# Altium PCB PMP9517.PcbDoc
Units mm, origin at the board's own origin, x right, y up, seen from the top; angles counter-clockwise.
Board outline 53.5 x 31 mm, 2 copper layers (Top Layer, Bottom Layer), stack 1.575 mm thick; 55 components, 23 nets, 103 pads, 12 vias.
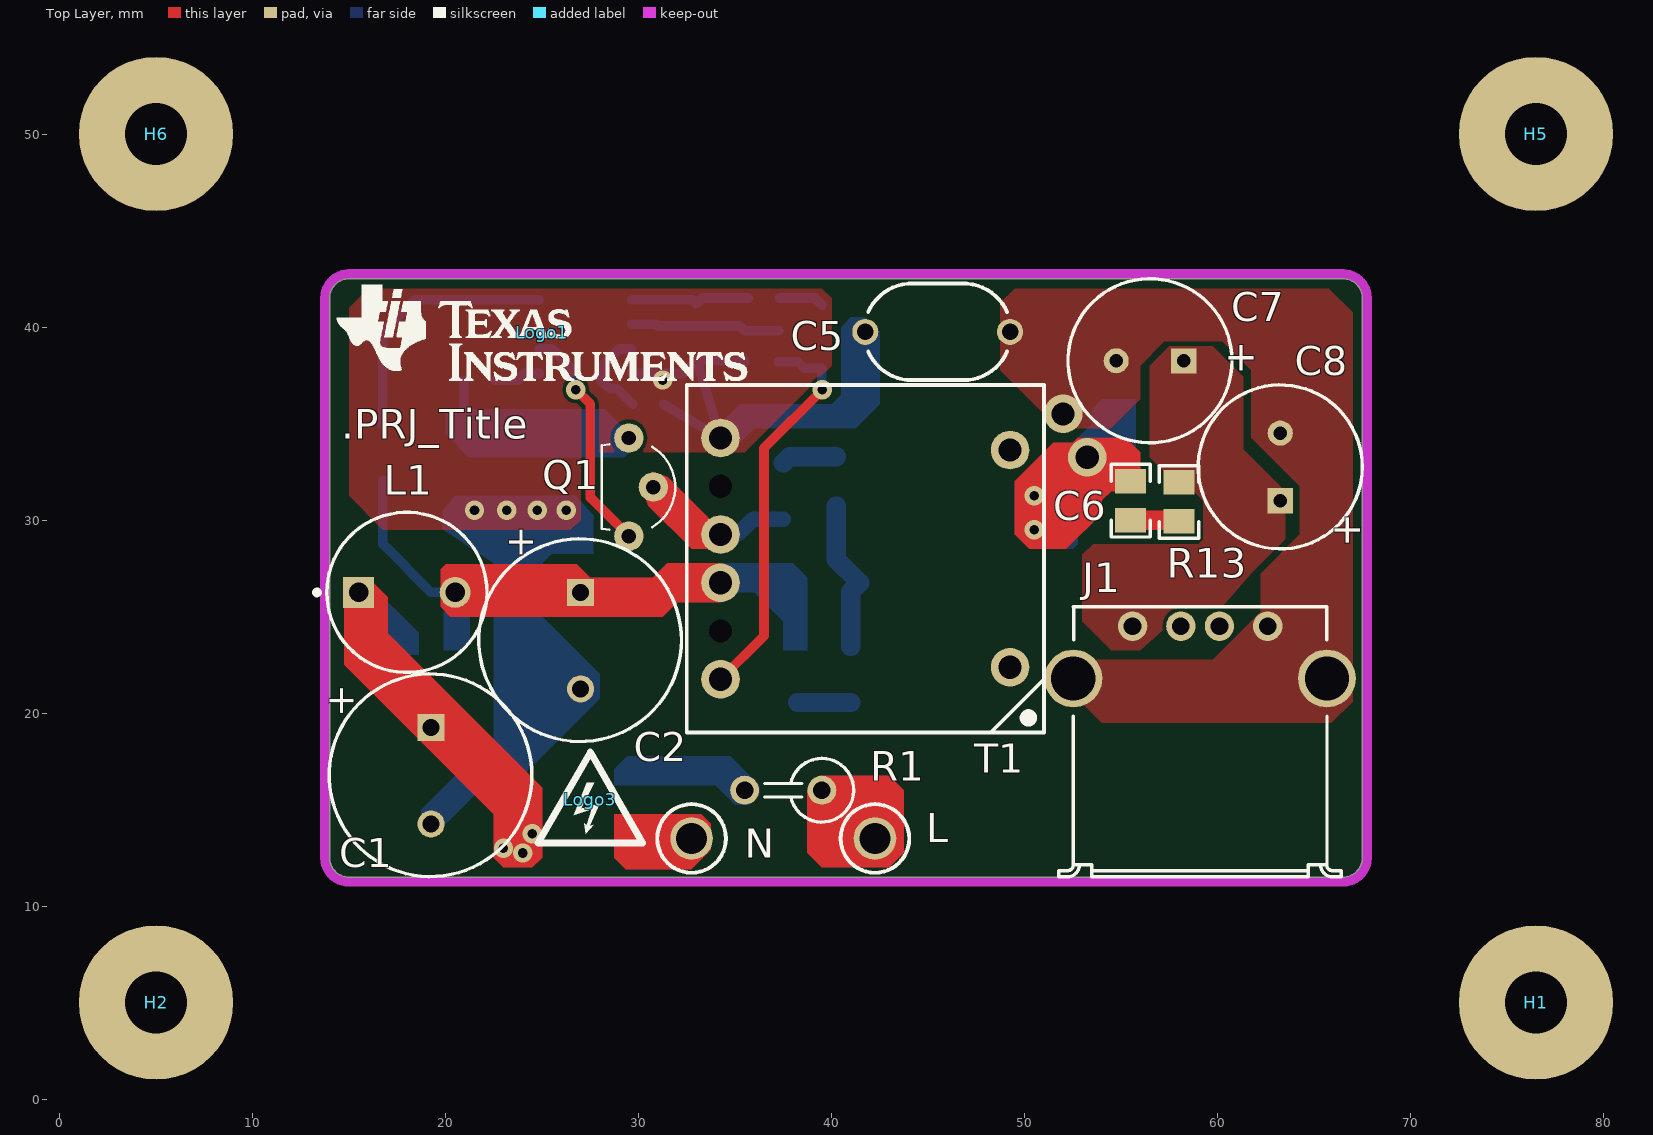
[diagram p0: Top Layer view]
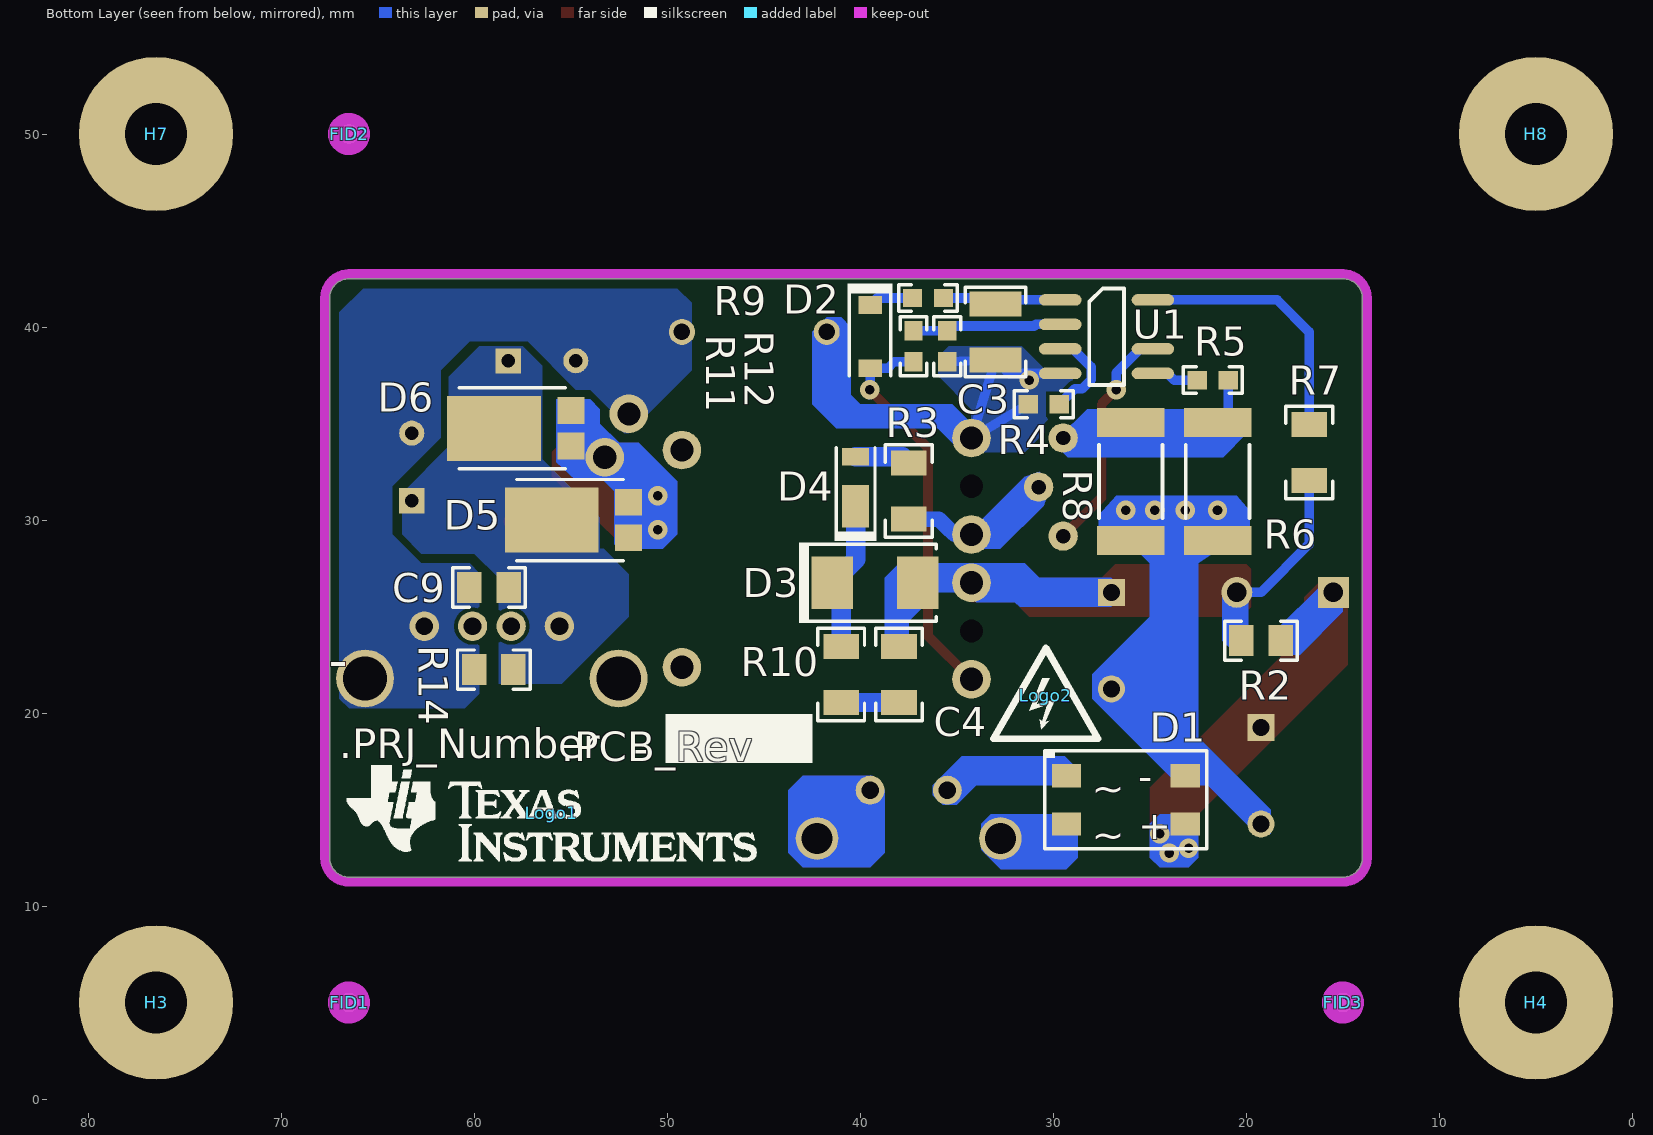
[diagram p1: Bottom Layer view, seen from below]

## Layer stack, top to bottom
Top Layer: signal copper 0.0356
Dielectric: core 1.5037, FR-4, Dk 4.8
Bottom Layer: signal copper 0.0356

## Board outline
15,11.5 cw(c15,12.5) 14,12.5 14,41.5 cw(c15,41.5) 15,42.5 66.5,42.5 cw(c66.5,41.5) 67.5,41.5 67.5,12.5 cw(c66.5,12.5) 66.5,11.5

## Design rules (kind name [scope] priority, off if disabled: settings)
AcuteAngle [All] p1: minimum=4.50000000000000E+0001 checktracksonly=FALSE
AssemblyTestPointUsage [All] p1: valid=2
Clearance "Schematic Clearance Constraint_1" [InNet('NetQ1_2')] p1: gap=1
Clearance "Schematic Clearance Constraint" [InNet('NetC2_1')] p2: gap=1
Clearance Clearance_BoardEdge_MountingHoles [OnCopper and InComponentClass('Mounting Holes') vs IsKeepOut] p3: gap=0.25
Clearance Clearance_BoardEdge_Poly [OnCopper and InPoly vs OnLayer('Keep-Out Layer')] p4: gap=0.5
Clearance Clearance_BoardEdge [OnCopper and Not InComponentClass('Logo') and not InComponentClass('FiducialMark') and not InRegion(1000,500,4000,800) and Not IsKeepout vs IsKeepOut] p5: gap=0
Clearance Clearance_Poly [InPolygon] p6: gap=0.2
Clearance [All] p7: gap=0.25
ComponentClearance ComponentClearance_Logo [InComponentClass(Logo)] p1: gap=0.2 collisioncheckmode=3 verticalgap=0.254 showdistances=FALSE
ComponentClearance ComponentClearance_ScrewToNut [(HasFootprint('NY PMS 440 0025 PH')) vs (HasFootprint('Keystone_1902C'))] p2: gap=0.127 collisioncheckmode=3 verticalgap=0.254 showdistances=FALSE
ComponentClearance ComponentClearance_MountingHoles [InComponentClass('Mounting Holes')] p3: gap=0.2 collisioncheckmode=3 verticalgap=0 showdistances=FALSE
ComponentClearance ComponentClearance_SmallPassives [HasFootprint('0201*') or HasFootprint('0402*') or HasFootprint('0508') or HasFootprint('0603*') or HasFootprint('0612') or HasFootprint('0805*') or HasFootprint('0815*') or HasFootprint('0830*') or HasFootprint('1206*') or HasFootprint('1210*') or HasFootprint('1808*') or HasFootprint('1812*') or HasFootprint('1825*') or HasFootprint('2010*') or HasFootprint('2220*') or HasFootprint('2225*') or HasFootprint('2512*') or HasFootprint('2728*') or HasFootprint('3518*') vs HasFootprint('0201*') or HasFootprint('0402*') or HasFootprint('0508') or HasFootprint('0603*') or HasFootprint('0612') or HasFootprint('0805*') or HasFootprint('0815*') or HasFootprint('0830*') or HasFootprint('1206*') or HasFootprint('1210*') or HasFootprint('1808*') or HasFootprint('1812*') or HasFootprint('1825*') or HasFootprint('2010*') or HasFootprint('2220*') or HasFootprint('2225*') or HasFootprint('2512*') or HasFootprint('2728*') or HasFootprint('3518*')] p4: gap=0.508 collisioncheckmode=3 verticalgap=0.254 showdistances=FALSE
ComponentClearance ComponentClearance_THtoSMT [IsThruComponent vs IsSMTComponent] p5: gap=0.2 collisioncheckmode=3 verticalgap=0 showdistances=FALSE
ComponentClearance ComponentClearance_THtoTH [IsThruComponent vs IsThruComponent] p6: gap=0 collisioncheckmode=3 verticalgap=0 showdistances=FALSE
ComponentClearance [All] p7: gap=0.2 collisioncheckmode=3 verticalgap=0.254 showdistances=FALSE
DiffPairsRouting [All] p1: maxlimit=2.54 minlimit=0.254 mostfreqgap=0.254 maxuncoupledlength=25.4
FabricationTestPointUsage TestPointUsage [All] p1: valid=2 allowmultiple=FALSE
FabricationTestpoint Testpoint [All] p1: side=3 testpointundercomponent=TRUE minsize=1.016 maxsize=2.54 preferedsize=1.524 minholesize=0 maxholesize=1.016 preferedholesize=0.813 testpointgrid=0.025 allowsidetop=TRUE allowsidebottom=TRUE usegrid=TRUE gridtolerance=0
FanoutControl Fanout_LCC [IsLCC] p1: bgadir=Out bgaviamode=Centered fanoutstyle=Auto fanoutdirection=Alternating viagrid=0.025 // Fanout_LCC (Default Rule)
FanoutControl Fanout_BGA [IsBGA] p2: bgadir=Out bgaviamode=Centered fanoutstyle=Auto fanoutdirection=Alternating viagrid=0.025 // Fanout_BGA (Default Rule)
FanoutControl Fanout_Default [All] p4: bgadir=Out bgaviamode=Centered fanoutstyle=Auto fanoutdirection=Alternating viagrid=0.025 // Fanout_Default (Default Rule)
FanoutControl Fanout_Small [(CompPinCount < 5)] p5: bgadir=Out bgaviamode=Centered fanoutstyle=Auto fanoutdirection=OutThenIn viagrid=0.025 // Fanout_Small (Default Rule)
Height [All] p1 off: minheight=0 maxheight=25.4 prefheight=12.7
HoleSize [All] p1: absolutevalues=TRUE maxlimit=6.375 minlimit=0.203 maxpercent=80.000 minpercent=20.000
MinimumAnnularRing [All] p1: minimumring=0.2
MinimumSolderMaskSliver MinimumSolderMaskSliver_Logo [InComponentClass('Logo') vs InComponentClass('Logo')] p1: minsoldermaskwidth=0.018
MinimumSolderMaskSliver [All] p2: minsoldermaskwidth=0.102
PlaneConnect [All] p1: planeconnectstyle=Relief reliefexpansion=0.254 reliefentries=4 reliefconductorwidth=0.254 reliefairgap=0.254
PolygonConnect PolygonConnect_25 [All vs IsNamedPolygon('Bottom Layer, Bottom-NEUTRAL')] p1: connectstyle=Relief reliefconductorwidth=0.38 reliefentries=4 polygonreliefangle="90 Angle" airgapwidth=0.254
PolygonConnect PolygonConnect_24 [All vs IsNamedPolygon('Bottom Layer, Bottom-NET00004 1')] p2: connectstyle=Relief reliefconductorwidth=0.38 reliefentries=4 polygonreliefangle="90 Angle" airgapwidth=0.254
PolygonConnect PolygonConnect_23 [All vs IsNamedPolygon('Bottom Layer, Bottom-NET00003')] p3: connectstyle=Relief reliefconductorwidth=0.38 reliefentries=4 polygonreliefangle="90 Angle" airgapwidth=0.254
PolygonConnect PolygonConnect_22 [All vs IsNamedPolygon('Bottom Layer, Bottom-NET00002 2')] p4: connectstyle=Relief reliefconductorwidth=0.38 reliefentries=4 polygonreliefangle="90 Angle" airgapwidth=0.254
PolygonConnect PolygonConnect_21 [All vs IsNamedPolygon('Bottom Layer, Bottom-LINE')] p5: connectstyle=Relief reliefconductorwidth=0.38 reliefentries=4 polygonreliefangle="90 Angle" airgapwidth=0.254
PolygonConnect PolygonConnect_20 [All vs IsNamedPolygon('Bottom Layer, Bottom-GND_EARTH')] p6: connectstyle=Relief reliefconductorwidth=0.38 reliefentries=4 polygonreliefangle="90 Angle" airgapwidth=0.254
PolygonConnect PolygonConnect_19 [All vs IsNamedPolygon('Bottom Layer-No Net')] p7: connectstyle=Direct reliefconductorwidth=0.254 reliefentries=4 polygonreliefangle="90 Angle" airgapwidth=0.254
PolygonConnect PolygonConnect_18 [All vs IsNamedPolygon('Bottom Layer-No Net')] p8: connectstyle=Direct reliefconductorwidth=0.254 reliefentries=4 polygonreliefangle="90 Angle" airgapwidth=0.254
PolygonConnect PolygonConnect_17 [All vs IsNamedPolygon('Bottom Layer-No Net')] p9: connectstyle=Direct reliefconductorwidth=0.254 reliefentries=4 polygonreliefangle="90 Angle" airgapwidth=0.254
PolygonConnect PolygonConnect_16 [All vs IsNamedPolygon('Bottom Layer-No Net')] p10: connectstyle=Direct reliefconductorwidth=0.254 reliefentries=4 polygonreliefangle="90 Angle" airgapwidth=0.254
PolygonConnect PolygonConnect_15 [All vs IsNamedPolygon('Bottom Layer, Bottom-GND 4')] p11: connectstyle=Direct reliefconductorwidth=0.254 reliefentries=4 polygonreliefangle="90 Angle" airgapwidth=0.254
PolygonConnect PolygonConnect_14 [All vs IsNamedPolygon('Bottom Layer, Bottom-GND 4')] p12: connectstyle=Direct reliefconductorwidth=0.254 reliefentries=4 polygonreliefangle="90 Angle" airgapwidth=0.254
PolygonConnect PolygonConnect_13 [All vs IsNamedPolygon('Bottom Layer, Bottom-GND 4')] p13: connectstyle=Relief reliefconductorwidth=0.254 reliefentries=4 polygonreliefangle="90 Angle" airgapwidth=0.254
PolygonConnect PolygonConnect_12 [All vs IsNamedPolygon('Bottom Layer, Bottom-GND 4')] p14: connectstyle=Direct reliefconductorwidth=0.254 reliefentries=4 polygonreliefangle="90 Angle" airgapwidth=0.254
PolygonConnect PolygonConnect_11 [All vs IsNamedPolygon('Bottom Layer, Bottom-GND 4')] p15: connectstyle=Direct reliefconductorwidth=0.254 reliefentries=4 polygonreliefangle="90 Angle" airgapwidth=0.254
PolygonConnect PolygonConnect_10 [All vs IsNamedPolygon('Bottom Layer, Bottom-GND 4')] p16: connectstyle=Direct reliefconductorwidth=0.254 reliefentries=4 polygonreliefangle="90 Angle" airgapwidth=0.254
PolygonConnect PolygonConnect_9 [All vs IsNamedPolygon('Bottom Layer, Bottom-GND 4')] p17: connectstyle=Direct reliefconductorwidth=0.254 reliefentries=4 polygonreliefangle="90 Angle" airgapwidth=0.254
PolygonConnect PolygonConnect_8 [All vs IsNamedPolygon('Bottom Layer, Bottom-GND 4')] p18: connectstyle=Direct reliefconductorwidth=0.254 reliefentries=4 polygonreliefangle="90 Angle" airgapwidth=0.254
PolygonConnect PolygonConnect_7 [All vs IsNamedPolygon('Bottom Layer, Bottom-VOUT 2') Or  IsNamedPolygon('Bottom Layer, Bottom-GND_EARTH') Or  IsNamedPolygon('Bottom Layer, Bottom-NET00004 1') Or  IsNamedPolygon('Bottom Layer, Bottom-VOUT') Or  IsNamedPolygon('Bottom Layer, Bottom-GND 4') Or  IsNamedPolygon('Bottom Layer, Bottom-VIN') Or  IsNamedPolygon('Bottom Layer, Bottom-NET00002 2') Or  IsNamedPolygon('Bottom Layer, Bottom-NET00003') Or  IsNamedPolygon('Bottom Layer, Bottom-VIN 1') Or  IsNamedPolygon('Bottom Layer, Bottom-LINE') Or  IsNamedPolygon('Bottom Layer, Bottom-NET00005') Or  IsNamedPolygon('Bottom Layer, Bottom-GND 2') Or  IsNamedPolygon('Bottom Layer, Bottom-BROWNOUT') Or  IsNamedPolygon('Bottom Layer, Bottom-NEUTRAL') Or  IsNamedPolygon('Bottom Layer, Bottom-NET00009')] p19: connectstyle=Relief reliefconductorwidth=0.2 reliefentries=4 polygonreliefangle="90 Angle" airgapwidth=0.254
PolygonConnect PolygonConnect_6 [All vs IsNamedPolygon('Bottom Layer, Bottom-VOUT 2') Or  IsNamedPolygon('Bottom Layer, Bottom-GND_EARTH') Or  IsNamedPolygon('Bottom Layer, Bottom-NET00004 1') Or  IsNamedPolygon('Bottom Layer, Bottom-VOUT') Or  IsNamedPolygon('Bottom Layer, Bottom-GND 4') Or  IsNamedPolygon('Bottom Layer, Bottom-VIN') Or  IsNamedPolygon('Bottom Layer, Bottom-NET00002 2') Or  IsNamedPolygon('Bottom Layer, Bottom-NET00003') Or  IsNamedPolygon('Bottom Layer, Bottom-VIN 1') Or  IsNamedPolygon('Bottom Layer, Bottom-LINE') Or  IsNamedPolygon('Bottom Layer, Bottom-NET00005') Or  IsNamedPolygon('Bottom Layer, Bottom-GND 2') Or  IsNamedPolygon('Bottom Layer, Bottom-BROWNOUT') Or  IsNamedPolygon('Bottom Layer, Bottom-NEUTRAL') Or  IsNamedPolygon('Bottom Layer, Bottom-NET00009')] p20: connectstyle=Relief reliefconductorwidth=0.35 reliefentries=4 polygonreliefangle="90 Angle" airgapwidth=0.254
PolygonConnect PolygonConnect_5 [All vs IsNamedPolygon('Bottom Layer, Bottom-GND_EARTH')] p21: connectstyle=Relief reliefconductorwidth=0.35 reliefentries=4 polygonreliefangle="90 Angle" airgapwidth=0.254
PolygonConnect PolygonConnect_4 [All vs IsNamedPolygon('Bottom Layer, Bottom-VOUT 2') Or  IsNamedPolygon('Bottom Layer, Bottom-GND_EARTH') Or  IsNamedPolygon('Bottom Layer, Bottom-NET00004 1') Or  IsNamedPolygon('Bottom Layer, Bottom-VOUT') Or  IsNamedPolygon('Bottom Layer, Bottom-GND 4') Or  IsNamedPolygon('Bottom Layer, Bottom-VIN') Or  IsNamedPolygon('Bottom Layer, Bottom-NET00002 2') Or  IsNamedPolygon('Bottom Layer, Bottom-NET00003') Or  IsNamedPolygon('Bottom Layer, Bottom-VIN 1') Or  IsNamedPolygon('Bottom Layer, Bottom-LINE') Or  IsNamedPolygon('Bottom Layer, Bottom-NET00005') Or  IsNamedPolygon('Bottom Layer, Bottom-GND 2') Or  IsNamedPolygon('Bottom Layer, Bottom-BROWNOUT') Or  IsNamedPolygon('Bottom Layer, Bottom-NEUTRAL') Or  IsNamedPolygon('Bottom Layer, Bottom-NET00009')] p22: connectstyle=Relief reliefconductorwidth=0.35 reliefentries=4 polygonreliefangle="90 Angle" airgapwidth=0.254
PolygonConnect PolygonConnect_3 [All vs IsNamedPolygon('Bottom Layer, Bottom-VOUT 2') Or  IsNamedPolygon('Bottom Layer, Bottom-GND_EARTH') Or  IsNamedPolygon('Bottom Layer, Bottom-NET00004 1') Or  IsNamedPolygon('Bottom Layer, Bottom-VOUT') Or  IsNamedPolygon('Bottom Layer, Bottom-GND 4') Or  IsNamedPolygon('Bottom Layer, Bottom-VIN') Or  IsNamedPolygon('Bottom Layer, Bottom-NET00002 2') Or  IsNamedPolygon('Bottom Layer, Bottom-NET00003') Or  IsNamedPolygon('Bottom Layer, Bottom-VIN 1') Or  IsNamedPolygon('Bottom Layer, Bottom-LINE') Or  IsNamedPolygon('Bottom Layer, Bottom-NET00005') Or  IsNamedPolygon('Bottom Layer, Bottom-GND 2') Or  IsNamedPolygon('Bottom Layer, Bottom-BROWNOUT') Or  IsNamedPolygon('Bottom Layer, Bottom-NEUTRAL') Or  IsNamedPolygon('Bottom Layer, Bottom-NET00009')] p23: connectstyle=Relief reliefconductorwidth=0.35 reliefentries=4 polygonreliefangle="90 Angle" airgapwidth=0.254
PolygonConnect PolygonConnect_2 [All vs IsNamedPolygon('Bottom Layer, Bottom-VOUT 2')] p24: connectstyle=Direct reliefconductorwidth=0.254 reliefentries=4 polygonreliefangle="90 Angle" airgapwidth=0.254
PolygonConnect PolygonConnect_1 [All vs IsNamedPolygon('Bottom Layer, Bottom-GND 4')] p25: connectstyle=Direct reliefconductorwidth=0.254 reliefentries=4 polygonreliefangle="90 Angle" airgapwidth=0.254
PolygonConnect [All] p26: connectstyle=Relief reliefconductorwidth=0.254 reliefentries=4 polygonreliefangle="90 Angle" airgapwidth=0.254
RoutingVias [All] p1: holewidth=0.5 width=1 viastyle="Through Hole" minholewidth=0.4 minwidth=0.8 maxholewidth=0.5 maxwidth=1
SMDToCorner [All] p1: distance=30000
SilkToSilkClearance [All] p1: silktosilkclearance=0
SilkscreenOverComponentPads [All] p1: minsilkscreentomaskgap=0
SolderMaskExpansion [All] p1: expansion=0.076
Width [All] p1: maxlimit=2 minlimit=0.2 preferedwidth=0.3 checkconnectedcopper=TRUE
13 further rules are at their usual default settings.

## Classes and differential pairs
component class PMP9517: C1 C2 C3 C4 C5 C6 C7 C8 C9 D1 D2 D3 D4 D5 D6 J1 L L1 N Q1 R1 R2 R3 R4 R5 R6 R7 R8 R9 R10 R11 R12 R13 R14 T1 U1
component class AssemblyNote: ZZ1 ZZ2 ZZ3 ZZ4
component class FiducialMark: FID1 FID2 FID3
component class Hardware: FID1 FID2 FID3 H1 H2 H3 H4 H5 H6 H7 H8 Logo1 Logo2 Logo3 ZZ1 ZZ2 ZZ3 ZZ4
component class Logo: Logo1
component class "Mounting Holes": H1 H2 H5 H6

## Components (designator, comment, footprint, x,y, rotation, side; value= is the part's Value field where it differs from the comment)
C1 "UVC2G100MPD" CAPPRD500W60D1000H1250 19.25,16.75 r270 top
C2 "UVC2G100MPD" CAPPRD500W60D1000H1250 27,23.75 r270 top
C3 "1210YD106KAT2A" 1210 33,39.75 r270 bottom
C4 "C1206C101JCGACTU" 1206 38,22 r270 bottom
C5 "VY2102M29Y5UG63V7" CAPRD750W60D750H1050 45.5,39.75 r0 top
C6 "08055C222KAT2A" 0805_HV 55.5,31 r270 top
C7 "RNE0J122MDN1PX" NRE-AX_800x1080 56.5,38.25 r180 top
C8 "CAP, [Technology], xxxF, xxV, +/-xx%, xxOhm ESR, [MountType]" NRE-AX_800x1080 63.25,32.75 r90 top
C9 "08055C104JAT2A" 0805_HV 59.25,26.5 r180 bottom
D1 "MB6S" MINIDIP-MB6S 26.25,15.5 r180 bottom
D2 "BAV21W-7-F" SOD-123 39.5,39.5 r270 bottom
D3 "SMBJ170A-TR" SMB 39.25,26.75 r180 bottom
D4 "DFLR1600-7" powerDI123 40.25,32 r90 bottom
D5 "PDS1040L-13" powerdi5 54,30 r0 bottom
D6 "PDS1040L-13" powerdi5 57,34.75 r0 bottom
FID1 "Fiducial" Fiducial10-20 66.5,5 r180 bottom
FID2 "Fiducial" Fiducial10-20 66.5,50 r180 bottom
FID3 "Fiducial" Fiducial10-20 15,5 r180 bottom
H1 "NY PMS 440 0025 PH" "NY PMS 440 0025 PH" 76.5,5 r0 top locked
H2 "NY PMS 440 0025 PH" "NY PMS 440 0025 PH" 5,5 r0 top locked
H3 "1902C" Keystone_1902C 76.5,5 r180 bottom locked
H4 "1902C" Keystone_1902C 5,5 r180 bottom locked
H5 "NY PMS 440 0025 PH" "NY PMS 440 0025 PH" 76.5,50 r0 top locked
H6 "NY PMS 440 0025 PH" "NY PMS 440 0025 PH" 5,50 r0 top locked
H7 "1902C" Keystone_1902C 76.5,50 r180 bottom locked
H8 "1902C" Keystone_1902C 5,50 r180 bottom locked
J1 "292303-4" CONN_TE_292303-4 59.1,24.5 r0 top
L "5005" Keystone5005 42.25,13.5 r0 top
L1 "768772102" IND_WE-TI_8095 18,26.25 r0 top
Logo1 "Texas Instruments" TI_Stacked_Overlay_Small 56,14.8 r180 bottom
Logo1 "Texas Instruments" TI_Stacked_Overlay_Small 25,39.7 r0 top
Logo2 "DANGER HIGH VOLTAGE" IEC_HighVoltage_Small 30.4,20.9 r180 bottom
Logo3 "DANGER HIGH VOLTAGE" IEC_HighVoltage_Small 27.5,15.5 r0 top
N "5006" Keystone5006 32.75,13.5 r0 top
Q1 "2STL2580" TO-92_AllBent 29.5,34.25 r270 top
R1 "SPP1UL3R30JLF" RES_ERG1S_V 37.5,16 r180 top
R2 "CRCW08056K80JNEA" 0805_HV 19.25,23.75 r0 bottom
R3 "CRCW12061R00JNEA" 1206 37.5,31.5 r90 bottom
R4 "CRCW060339K0JNEA" 0603 30.5,36 r180 bottom
R5 "CRCW06031K50FKEA" 0603 21.75,37.25 r0 bottom
R6 "CRCW251222R0JNEGHP" 2512M 21.5,32 r90 bottom
R7 "RC1206FR-07100KL" 1206 16.75,33.5 r90 bottom
R8 "ERJ-1TRQF1R3U" 2512M 26,32 r90 bottom
R9 "CRCW060333R0JNEA" 0603 36.5,41.5 r0 bottom
R10 "CRCW12061K50FKEA" 1206 41,22 r270 bottom
R11 "CRCW0603100KFKEA" 0603 37.25,39 r270 bottom
R12 "RC0603JR-0727KL" 0603 35.5,39 r90 bottom
R13 "CRCW08051M00JNEA" 0805_HV 58.006,30.94 r90 top
R14 "CRCW08053K30JNEA" 0805_HV 59,22.25 r180 bottom
T1 "EPC17" MAG\TH\EPC17 41.75,28 r180 top
U1 "UCC28720D" D0007A_N 27.25,39.5 r180 bottom
ZZ1 "This Assembly Note is for PCB labels only" AssemblyNoteLabel -8.5,81 r0 top
ZZ2 "These assemblies are ESD sensitive, ESD precautions shall be observed." AssemblyNote -8,77.75 r0 top
ZZ3 "These assemblies must be clean and free from flux and all contaminants. Use of no clean flux is not acceptable." AssemblyNote -8,75 r0 top
ZZ4 "These assemblies must comply with workmanship standards IPC-A-610 Class 2., unless otherwise specified." AssemblyNote -8,72.25 r0 top

## Footprints (in the part's own frame and the unit in brackets; to place one, negate y for a bottom-side part, rotate by r counter-clockwise, add the part's x,y. Pads: shape width x height; smd on the part's side, far side on the other; paste and mask are expansions set on the pad)
0603 [mm] "0603 from SM-752 data"
  rect 1x0.95 smd: 1(-0.8,0) 2(0.8,0)
  silkscreen extent -1.52,-0.69 1.52,0.69, body extent -0.87,-0.47 0.87,0.47, height 0.85
0805_HV [mil] "0805 with 30mil clearance between pads"
  rect 50x63 smd: 1(-40,0) 2(40,0)
  silkscreen extent -74,-40 74,40, body extent -43,-29 43,29, height 43
1206 [mm] "1206 from SM-752 data"
  rect 1.3x1.85 smd: 1(-1.45,0) 2(1.45,0)
  silkscreen extent -2.4,-1.21 2.4,1.21, body extent -1.7,-0.9 1.7,0.9, height 1.35
1210 [mm] "1210 from SM-752 data"
  rect 1.3x2.7 smd: 1(-1.45,0) 2(1.45,0)
  silkscreen extent -2.32,-1.57 2.32,1.57, body extent -1.7,-1.35 1.7,1.35, height 1.35
2512M [mm] "Chip Resistor, Body 6.3x3.2mm, IPC Low Density"
  rect 1.5x3.5 smd: 1(-3.05,0) 2(3.05,0)
  silkscreen extent -1.9,-1.65 1.9,1.65, body extent -3.22,-1.67 3.22,1.67, height 0.71
AssemblyNote [mm] "Assembly Note"
AssemblyNoteLabel [mm] "Assembly Note for PCB Labels"
CAPPRD500W60D1000H1250 [mm] "Capacitor, Electrolytic, Radial; Body 10 x 12.5 mm (Dia.xH typ); Pin Spacing 5 mm (typ)"
  rect 1.4x1.4 hole 0.889: 1(-2.5,0)
  round 1.4 hole 0.889: 2(2.5,0)
  silkscreen extent -5.27,-5.27 5.22,5.22, body extent -5,-4.99 5,4.99, height 14.12
CAPRD750W60D750H1050 [mm] "Vishay BC Components"
  round 1.35 hole 0.85: 1(-3.75,0) 2(3.75,0)
  silkscreen extent -3.6,-2.51 3.6,2.51, body extent -4.05,-2.5 4.05,2.5, height 10.49
CONN_TE_292303-4 [mm] "TE Connectivity"
  round 1.524 hole 0.92: 1(-3.5,0) 2(-1,0) 3(1,0) 4(3.5,0)
  round 3 hole 2.3: 5(-6.57,-2.71) 6(6.57,-2.71)
  silkscreen extent -7.32,-12.99 7.3,1.01, body extent -8.12,-12.99 8.12,1.01, height 7.67
D0007A_N [mm] "SOIC, 7-Leads, Body 4.9x3.9mm, Pitch 1.27mm, IPC Medium Density"
  oval 2.2x0.6 smd: 1(-2.4,1.905) 2(-2.4,0.635) 3(-2.4,-0.635) 4(-2.4,-1.905) 5(2.4,-1.905) 6(2.4,-0.635) 8(2.4,1.905)
  silkscreen extent -0.9,-2.5 0.9,2.5, body extent -3,-2.5 3,2.5, height 1.54
Fiducial10-20 [mm]
  round 1 smd paste-0.5 mask+0.5: 1(0,0)
  Top Layer keep-out circle w1.178: c0,0 r0.5
IEC_HighVoltage_Small [mm]
  silkscreen extent -2.72,-2.24 2.72,2.47
IND_WE-TI_8095 [mm] "Wurth WE-TI 8095"
  rect 1.6x1.6 hole 1: 1(-2.5,0)
  round 1.6 hole 1: 2(2.5,0)
  silkscreen extent -4.79,-4.15 4.15,4.15, body extent -4.12,-4.14 4.15,4.14, height 10
Keystone5005 [mil] "Keystone Compact loops"
  round 87 hole 63: 1(0,0)
  silkscreen extent -70,-70 70,70, body extent -63,-63 62,63, height 225
Keystone5006 [mil] "Keystone Compact loops"
  round 87 hole 63: 1(0,0)
  silkscreen extent -70,-70 70,70, body extent -63,-63 62,63, height 225
Keystone_1902C [mm] "Hex Standoff, 4-40 threaded, nylon"
  body extent -3.68,-3.2 3.71,3.2, height 12.73
MAG\TH\EPC17 [mm]
  round 2 hole 1.2 mask+0.05: 1(-7.5,5.625) 2(-11.5,-5.25) 3(-10.25,-7.5) 4(-7.5,-5.625) 5(7.5,-6.25) 7(7.5,-1.25) 8(7.5,1.25) 10(7.5,6.25)
  round 0 hole 1.2 unplated mask+0.05: 6(7.5,-3.75) 9(7.5,3.75)
  silkscreen extent -9.25,-9 9.25,9
MINIDIP-MB6S [mm] "Land pattern created based on STEP model."
  rect 1.52x1.2 smd: 1(-3.075,1.25) 2(-3.075,-1.25) 3(3.075,-1.25) 4(3.075,1.25)
  silkscreen extent -4.19,-2.54 4.19,2.54, body extent -3.5,-2.45 3.5,2.45, height 2.75
NRE-AX_800x1080 [mm] "NIC COMPONENTS CORP."
  rect 1.3x1.3 hole 0.7: 1(-1.75,0)
  round 1.3 hole 0.7: 2(1.75,0)
  silkscreen extent -4.25,-4.25 4.25,4.25, body extent -4.22,-4.24 4.24,4.24, height 12.31
"NY PMS 440 0025 PH" [mm] "4-40 nylon screw and mounting hole"
  round 8 hole 3.2: 1(0,0)
  body extent -3.3,-3.3 3.3,3.3, height 2.69
powerdi5 [mm] "Diodes Inc recommended land pattern, ap02001.pdf rev 60"
  rect 1.4x1.39 smd: 1(-1.991,0.92) 2(-1.991,-0.92)
  rect 4.86x3.36 smd: 3(1.991,0)
  silkscreen extent -1.7,-2.1 3.8,2.1, body extent -2.27,-2.02 4.33,2.03, height 1.17
powerDI123 [mm] "Diodes Inc recommended land pattern, document number DS30628 Rev. 6-2"
  rect 2.2x1.4 smd: 1(-1.275,0)
  rect 0.9x1.4 smd: 2(1.275,0)
  silkscreen extent -3.1,-1.09 1.76,1.09, body extent -2.37,-0.96 1.53,0.97, height 1
RES_ERG1S_V [mm] "PANASONIC"
  round 1.5 hole 0.9: 1(-2,0) 2(2,0)
  silkscreen extent -3.65,-1.65 0.95,1.65, body extent -3.65,-1.65 2.35,1.64, height 13.95
SMB [mm] "Molded Diode, 2-Leads, Body 5.4x3.6mm, IPC Medium Density, based on OnSemi component dimensions"
  rect 2.159x2.743 smd: 1(-2.21,0) 2(2.21,0)
  silkscreen extent -3.94,-2.08 3.18,2.08, body extent -2.7,-1.8 2.7,1.8, height 2.32
SOD-123 [mm] "On Semi recommended land pattern"
  rect 0.915x1.22 smd: 1(-1.637,0) 2(1.637,0)
  silkscreen extent -2.74,-1.17 2.03,1.17, body extent -1.93,-0.9 1.93,0.9, height 1.35
TI_Stacked_Overlay_Small [mm]
  silkscreen extent -10.63,-2.49 10.63,2.49
TO-92_AllBent [mil] "Leads bent to gain clearance between pins"
  round 60 hole 29.53: 1(0,0) 2(100,50) 3(200,0)
  silkscreen extent 12,-55 188,94, body extent -12,-55 212,94, height 289

## Part data
C1 C2 C7: library part Capacitor_Polarized, "CAP, [Technology], xxxF, xxV, +/-xx%, xxOhm ESR, [MountType]"
C3: "CAP, CERM, 10uF, 16V, +/-10%, X5R, 1210"
C4: "CAP, CERM, 100pF, 500V, +/-5%, C0G/NP0, 1206"
C5: "CAP, CERM, 1000pF, 300V, +/-20%, Y5U, Radial Disc 7.5mm, ls=7.5"
C6: "CAP, CERM, 2200pF, 50V, +/-10%, X7R, 0805"
C8: library part Capacitor_Polarized
C9: "CAP, CERM, 0.1uF, 50V, +/-5%, X7R, 0805"
D1: "Diode, Switching-Bridge, 600V, 1A, TH"
D2: "Diode, Switching, 200V, 0.2A, SOD-123"
D3: "Diode, TVS, Uni, 170V, 600W, SMB"
D4: library part Diode, "Diode, [Type], xxxV, x.xxA, [PackageReference]"
D5 D6: library part 30WQ04FNPBF, "Diode, Schottky, 40V, 3.5A, DPAK"
FID1 FID2 FID3: "Fiducial mark.  There is nothing to buy or mount."
H1 H2 H5 H6: "Machine Screw, Round, #4-40 x 1/4, Nylon, Philips panhead"
H3 H4 H7 H8: "Standoff, Hex, 0.5\"L #4-40 Nylon"
J1: "Connector, USB Type A, Receptacle, R/A, TH"
L: "Test Point, Compact, Red, TH"
L1: "Inductor, Shielded Drum Core, Metal Composite, 1mH, 0.5A, 1.7 ohm, TH"
Logo1 Logo1: library part TI_Logo, "Texas Instrument Corporate Signature"
Logo2 Logo3: library part IEC_HighVoltage, "IEC 61010-1 High Voltage Warning"
N: "Test Point, Compact, Black, TH"
Q1: library part "STBV32-AP, ST Microelectronics", "Transistor, NPN, 400V, 1.5A, TO-92AP"
R1: library part Resistor, "RES, xxx ohm, x%, xW, [PackageReference]"
R2: "RES, 6.8k ohm, 5%, 0.125W, 0805"
R3: "RES, 1.0 ohm, 5%, 0.25W, 1206"
R4: "RES, 39k ohm, 5%, 0.1W, 0603"
R5: "RES, 1.50k ohm, 1%, 0.1W, 0603"
R6: "RES, 22 ohm, 5%, 1.5W, 2512"
R7: "RES, 100k ohm, 1%, 0.25W, 1206"
R8: "RES, 1.30 ohm, 1%, 1W, 2512"
R9: "RES, 33 ohm, 5%, 0.1W, 0603"
R10: "RES, 1.50k ohm, 1%, 0.25W, 1206"
R11: "RES, 100k ohm, 1%, 0.1W, 0603"
R12: "RES, 27k ohm, 5%, 0.1W, 0603"
R13: "RES, 1.0Meg ohm, 5%, 0.125W, 0805"
R14: "RES, 3.3k ohm, 5%, 0.125W, 0805"
T1: "JohnGriffin"
U1: "CONSTANT-VOLTAGE, CONSTANT-CURRENT CONTROLLER WITH PRIMARY SIDE REGULATION, D0007A"
ZZ1: library part AssemblyNoteLabel
ZZ2 ZZ3 ZZ4: library part AssemblyNote

## Free pads (board coordinates)
  round 0 hole 0.5 unplated: 0(13.5,27) 0(39,11) 0(39,43) 0(68,27)

## Via types
v1: diameter 1, hole 0.5, Top Layer to Bottom Layer, tented both sides, 12 vias

## Nets (pads, with @x,y where several pads share a name; then routed paths per layer and width w, separated by ;. In a path a pad name is that pad's centre, name@x,y a point inside that pad or via, vN(x,y) a via of type N, cw(c..) or ccw(c..) an arc to the next point about the centre after c; other vN are vias at no path point)
+VOUT: C7.1 C8.1 C9.2 D5.3 D6.3 J1.1 R13.2 R14.2
-VOUT: C5.2 C7.2 C8.2 C9.1 J1.4 J1.5 J1.6 R14.1 T1.3
GND: C1.2 C2.2 C3.2 C5.1 D1.4 R4.1 R6.1 R8.1 R12.1 T1.5 U1.4 | length 13.8
  Bottom Layer w0.5: U1.4 32.295,37.595 C3.2 ; R4.1 T1.5 C3.2 ; R12.1 C3.2
  other v1: 21.5,30.5 23.175,30.5 24.75,30.5 26.25,30.5 31.25,37.25
NetC1_1: C1.1 D1.3 L1.1 R2.1
  other v1: 24,12.75 23,13 24.5,13.75
NetC2_1: C2.1 C4.1 D3.2 L1.2 R2.2 R7.1 T1.8 | length 8.1
  Bottom Layer w0.5: R7.1 16.75,28.75 19.25,26.25 L1.2
NetC4_2: C4.2 R10.2 | length 2.8
  Bottom Layer w1: C4.2@38.25,20.55 R10.2
NetC6_1: C6.1 D5.1 D5.2 D6.1 D6.2 T1.2
  other v1: 50.5,29.5 50.5,31.25
NetC6_2: C6.2 R13.1 | length 2.5
  Top Layer w1: C6.2 57.946,29.984 R13.1
NetD1_1: D1.1 R1.2
NetD1_2: D1.2 N.1
NetD2_1: D2.1 R9.2 | length 2.4
  Bottom Layer w0.5: R9.2 39.137,41.5 D2.1
NetD2_2: D2.2 R11.2 T1.10 | length 21.2
  Top Layer w0.5: T1.10 36.5,24 36.5,33.725 v1(39.525,36.75)
  Bottom Layer w0.5: R11.2 38.25,38.2 38.588,37.862 D2.2 39.5,36.75 39.501,36.745 39.55,36.5 v1(39.525,36.75)
NetD3_1: D3.1 D4.1 R10.1 | length 8
  Bottom Layer w1: D4.1 40.25,27.96 D3.1 41,26.29 R10.1
NetD4_2: D4.2 R3.2 | length 2.9
  Bottom Layer w1: R3.2 37.825,33.275 D4.2
NetL_1: L.1 R1.1
NetQ1_1: Q1.1 R5.1 R6.2 R8.2 | length 2.4
  Bottom Layer w0.5: R5.1 20.95,35.6 R6.2
NetQ1_2: Q1.2 R3.1 T1.7 | length 3.3
  Bottom Layer w0.8: T1.7 35.109,29.25 T1.7@35.209,29.35 ; 35.416,29.522 35.944,30.05 R3.1
NetQ1_3: Q1.3 U1.6 | length 12
  Top Layer w0.5: v1(26.75,36.75) 27.5,36 27.5,31.17 Q1.3
  Bottom Layer w0.5: U1.6 25.511,38.865 26.75,37.626 v1(26.75,36.75)
NetR4_2: R4.2 U1.3 | length 4.8
  Bottom Layer w0.5: U1.3 28.989,38.865 28.05,37.926 28.05,37.264 28.519,36.795 28.905,36.795 R4.2
NetR5_2: R5.2 U1.5 | length 2.4
  Bottom Layer w0.5: R5.2 23.75,37.25 24.095,37.595 U1.5
NetR7_2: R7.2 U1.8 | length 13.6
  Bottom Layer w0.5: R7.2 16.75,39.75 18.405,41.405 U1.8
VDD: C3.1 R9.1 U1.1 | length 6.3
  Bottom Layer w0.5: U1.1 32.795,41.405 C3.1 33.3,41.5 R9.1
VS: R11.1 R12.2 U1.2 | length 7.7
  Bottom Layer w0.5: U1.2 30.915,40.135 31,40.05 35.25,40.05 R12.2 R11.1
pads on no net: FID1.1 FID2.1 FID3.1 H1.1 H2.1 H5.1 H6.1 J1.2 J1.3 T1.1 T1.4 T1.6 T1.9

## Polygon pours and split planes (outlines as drawn)
-VOUT on Top Layer "Bottom Layer-No Net" (solid, remove dead copper, pour order 14): 52.25,22.75 52.25,21.25 54,19.5 65.9,19.5 67.4,21 67.4,40.35 65.756,41.994 49.494,41.994 48.75,41.25 48.75,37.75 51.75,34.75 54.5,34.75 56,36.25 56,38 57.25,39.25 60.25,39.25 61.75,37.75 61.75,34.25 64.25,31.75 64.25,29.25 62.25,27.225 62.25,25.25 59.75,22.75
+VOUT on Top Layer "Bottom Layer-No Net" (solid, remove dead copper, pour order 10): 57.5,39 56.5,38 56.5,33.25 57.25,32.5 57.25,31.621 57.281,31.59 58.66,31.59 59.25,31 59.25,29 59,28.75 53.567,28.75 53,28.2 53,24.75 54.5,23.25 56,23.25 58.5,25.512 60.25,25.512 61.75,27.25 63.5,29 63.5,31.5 61.331,33.669 61.331,37.419 59.75,39
GND on Top Layer "Bottom Layer-No Net" (solid, remove dead copper, pour order 2): 15,40 15,31.25 16.75,29.5 26.5,29.5 27,30 27,33 27.5,33.5 35.5,33.5 40,38 40,41.5 39.5,42 16,42 15,41
-VOUT on Bottom Layer "Bottom Layer-No Net" (solid, remove dead copper, pour order 12): 52,34.5 48.75,37.75 48.75,41.25 49.75,42.25 65.5,42.25 67.25,40.5 67.25,21 66.5,20.25 60.5,20.25 59.75,21 59.75,27.25 60.25,27.75 62.75,27.75 64.25,29.25 64.25,31.75 61.75,34.25 61.75,37.75 60.25,39.25 57.25,39.25 54.75,36.75 54,36.75 52.75,35.5 52.75,35 52.25,34.5
+VOUT on Bottom Layer "Bottom Layer-No Net" (solid, remove dead copper, pour order 8): 57.5,39 56.5,38 56.5,33.15 53.5,30.15 53.5,28.5 53.3,28.5 52,27.2 52,25 55.474,21.526 58.75,21.526 58.75,27 60,28.25 62.75,28.25 63.75,29.25 63.75,31.391 61.331,33.81 61.331,37.419 59.75,39
GND on Bottom Layer "Bottom Layer-No Net" (solid, remove dead copper, pour order 6): 34,33.5 31.5,33.5 30.486,34.514 30.486,35.014 30,35.5 29,36.5 29,37.365 29.435,37.8 30.45,37.8 31.65,39 35.425,39 35.975,38.45 35.975,37.475 34.25,35.75 34.25,34.75 34.75,34.25

## Keep-outs
Keep-Out Layer:
  lines w0.5: 13.75,12.5 ccw(c15,12.5) 15,11.25 66.5,11.25 ccw(c66.5,12.5) 67.75,12.5 67.75,41.5 ccw(c66.5,41.5) 66.5,42.75 15,42.75 ccw(c15,41.5) 13.75,41.5 13.75,12.5
  text ".Layer_Name" at -10.844,-38.306 h1.52

## Other copper
Top Layer:
  region net NetL_1: 38.75,16 38.75,12.75 39.5,12 43,12 43.75,12.75 43.75,16 43,16.75 39.4,16.75 39,16.35
  region net NetD1_2: 28.75,14.75 33.25,14.75 33.75,14.25 33.75,12.906 32.744,11.9 29.35,11.9 28.75,12.5
  region net NetC6_1: 49.5,29.25 50.25,28.5 52.165,28.5 54,30.335 54,31.016 54.484,31.5 55.25,31.5 56,32.25 56,33.5 55.25,34.25 52.75,34.25 52.5,34 51.5,34 49.5,32
  region net NetC2_1: 19.75,27.45 20,27.7 26.8,27.7 27.5,27 30.75,27 31.5,27.75 34.25,27.75 35.25,26.75 34.25,25.75 32,25.75 31.25,25 20.25,25 19.75,25.5
  region net NetC1_1: 14.75,22.5 22.5,14.75 22.5,12.5 23,12 24.5,12 25,12.5 25,16.12 17,24.12 17,26 16,27 15.25,27 14.75,26.5
  region net NetQ1_2: 30.5,30.75 32.75,28.5 34.25,28.5 34.25,30 33.75,30 31.5,32.25 30.75,32.5 30.5,32.25 30.25,31.5
  text ".Layer_Name" at -10.844,-38.306 h1.52
Bottom Layer:
  region net NetL_1: 38.75,16 38.75,12.75 39.5,12 43,12 43.75,12.75 43.75,16 43,16.75 39.4,16.75 39,16.35
  region net NetD1_2: 28.75,14.75 33.25,14.75 33.75,14.25 33.75,12.906 32.744,11.9 29.35,11.9 28.75,12.5
  region net NetC6_1: 55.75,36.25 54,36.25 53.5,35.75 53.5,35 52.5,34 51.5,34 49.5,32 49.5,29.25 50.25,28.5 52.5,28.5 52.75,28.75 52.75,31.5 53.266,32.016 54.776,32.099 55.75,33
  region net GND: 34.25,35.014 35.236,36 40,36 40.5,36.5 40.5,40 41,40.5 41.75,40.5 42.5,39.75 42.5,36 41.25,34.75 36,34.75 34.75,33.5 34.25,33.5
  region net NetD1_1: 28.75,16.25 34,16.25 35,15.25 35.75,15.25 36.25,15.75 36.25,16.25 34.75,17.75 29.425,17.75 28.75,17.075
  region net NetC1_1: 22.5,14.803 22.5,12.5 23,12 24.5,12 25,12.5 25,14.25 24.5,14.75
  region net GND: 18.75,13.75 18.75,15 22.5,18.75 22.5,27.75 19.825,29.537 19.85,30.5 20.5,31.25 26.75,31.25 27.65,30.25 27.65,28.25 25.5,28.25 25,27.75 25,25 28,22 28,20.75 23.5,16.25 22,16.25 19.5,13.75
  region net NetC2_1: 34.25,27.75 31.5,27.75 30.75,27 27,27 26.5,26.5 26.5,26 27,25.5 31.75,25.5 32,25.75 34,25.75 35,26.75
  region net NetC1_1: 15,26.75 15,25.241 17.241,23 17.267,23.026 18.601,23.026 18.601,24.149 16,26.75
  region net NetC2_1: 19.9,23.25 19.9,26.4 20.5,27 21.25,26.25 21.25,23.75 20.75,23.25
  region net NetC2_1: 34.25,27.75 38,27.75 38.75,27 38.75,23.2 38.7,23.25 37.5,23.25 37.5,24.75 36,26.25 35,26.25 34.25,27
  region net NetQ1_1: 20,35.75 28.25,35.75 29.75,34.25 29.75,33.75 29.25,33.25 21.213,33.25 20,34.463
  region net NetQ1_2: 30.5,30.75 32.75,28.5 34.25,28.5 34.25,30 33.75,30 31.5,32.25 30.75,32.5 30.5,32.25 30.25,31.5
  text ".Layer_Name" at -10.844,-38.306 h1.52

## Silkscreen, mask and mechanical layers (free items; w line width, h text height)
Top Overlay:
  text ".PRJ_Title" at 14.6,34.2 h1.52
  text ".Layer_Name" at -10.844,-38.306 h1.52
Bottom Overlay:
  rectangle: 42.48,17.4 50.1,19.94
  text "-" at 67.56,21.78 h2
  text ".PRJ_Number" at 67.016,17.654 h1.52
  text ".PCB_Rev" at 55.5,17.5 h1.52
  text "-" at 51.751,17.387 h1.52
  text ".Layer_Name" at -10.844,-38.306 h1.52
Top Paste:
  text ".Layer_Name" at -10.844,-38.306 h1.52
Bottom Paste:
  text ".Layer_Name" at -10.844,-38.306 h1.52
Top Solder:
  text ".Layer_Name" at -10.844,-38.306 h1.52
  text ".Layer_Name" at -10.844,-38.306 h1.52
Bottom Solder:
  text ".Layer_Name" at -10.844,-38.306 h1.52
Drill Guide:
  text ".Layer_Name" at -10.844,-38.306 h1.52
M1 Board Outline:
  the board outline again, w0.254
  text ".Layer_Name" at -10.844,-38.306 h1.52
M2 Board Dimensions:
  lines w0.2: 14,25.5 ccw(c13,25.5) 12,25.5 12,11.5 ccw(c14,11.5) 14,9.5 37.5,9.5 ccw(c37.5,10.5) 37.5,11.5 ; 14,28.5 cw(c13,28.5) 12,28.5 12,42.5 cw(c14,42.5) 14,44.5 37.5,44.5 cw(c37.5,43.5) 37.5,42.5 ; 40.5,11.5 ccw(c40.5,10.5) 40.5,9.5 67.5,9.5 ccw(c67.5,11.5) 69.5,11.5 69.5,25.5 ccw(c68.5,25.5) 67.5,25.5 ; 40.5,42.5 cw(c40.5,43.5) 40.5,44.5 67.5,44.5 cw(c67.5,42.5) 69.5,42.5 69.5,28.5 ; 67.493,28.533 ccw(c68.493,28.533) 69.493,28.533
  lines w0.254: 0,0 0,55 81.5,55 81.5,0 0,0
  text ".Layer_Name" at -10.844,-38.306 h1.52
M3 3D STEP Top:
  text ".Layer_Name" at -10.844,-38.306 h1.52
M4 3D STEP Bottom:
  text ".Layer_Name" at -10.844,-38.306 h1.52
M5 Assembly Top:
  lines w0.178: 25.281,-12.943 53.856,-12.943 ; 25.281,-9.832 53.792,-9.832 ; 33.282,-15.991 33.282,-6.784 ; 43.061,-15.991 25.281,-15.991 ; 43.061,-6.784 25.281,-6.784 ; 25.281,-15.991 25.281,-6.784 ; 25.281,-15.991 53.856,-15.991 53.856,-6.784 25.281,-6.784
  lines w0.254: -32.917,-40.126 134.723,-40.126 ; -32.917,-34.962 134.774,-34.962 ; -32.917,-29.797 -32.917,-45.291 68.81,-45.291 134.774,-45.291 134.774,-29.797 -32.904,-29.797 -32.904,-45.291 7.114,-45.291 ; 29.694,-45.291 29.694,-29.797 ; 61.876,-34.962 61.876,-29.797 ; 83.212,-34.962 83.212,-29.797 ; 99.011,-45.456 99.011,-40.304
  text "TABLE 1" at 35.123,-5.895 h1.02
  text "Variant" at 25.916,-8.689 h1.02
  text "Label text" at 36.965,-8.689 h1.02
  text "001" at 27.63,-11.737 h1.02
  text "UCC28720" at 34.679,-11.8 h1.02
  text "002" at 27.63,-14.912 h1.02
  text "ChangeMe!" at 34.552,-14.975 h1.02
  text "COMPONENTS MARKED 'DNP' SHOULD NOT BE POPULATED." at 3.799,-24.59 h1.52
  text "ASSEMBLY VARIANT:" at 3.786,-27.524 h1.52
  text ".VariantName" at 30.101,-27.524 h1.52
  text "PCB VIEWED FROM TOP SIDE" at -31.304,-33.154 h1.52
  text "BOARD #:" at 31.599,-33.154 h1.52
  text ".PRJ_Number" at 45.455,-33.154 h1.52
  text "REV:" at 66.905,-33.154 h1.52
  text ".PCB_Rev" at 74.309,-33.154 h1.52
  text "SVN REV:" at 88.19,-33.154 h1.52
  text ".VersionControl_RevNumber" at 101.043,-33.154 h1.52
  text "IGNORE ->" at -31.304,-38.306 h1.52
  text "PLOT NAME =" at -31.304,-43.534 h1.52
  text ".plot_File_Name" at -10.844,-43.534 h1.52
  text "GENERATED    :" at 31.65,-43.534 h1.52
  text ".Print_Date" at 53.735,-43.534 h1.52
  text ".Print_Time" at 72.252,-43.534 h1.52
  text "TEXAS INSTRUMENTS" at 104.37,-43.534 h1.52
M6 Assembly Bottom:
  lines w0.254: -32.929,-34.974 134.761,-34.974 ; -32.879,-40.139 134.761,-40.139 ; 2.834,-45.469 2.834,-40.317 ; 18.633,-34.974 18.633,-29.81 ; 39.969,-34.974 39.969,-29.81 ; 72.15,-45.304 72.15,-29.81 ; 94.731,-45.304 134.749,-45.304 134.749,-29.81 -32.929,-29.81 -32.929,-45.304 33.034,-45.304 134.761,-45.304 134.761,-29.81
  text "COMPONENTS MARKED 'DNP' SHOULD NOT BE POPULATED." at 129.491,-24.577 h1.52
  text ".VariantName" at 102.973,-27.524 h1.52
  text "ASSEMBLY VARIANT:" at 129.364,-27.524 h1.52
  text ".VersionControl_RevNumber" at 0.802,-33.167 h1.52
  text "SVN REV:" at 13.654,-33.167 h1.52
  text ".PCB_Rev" at 27.535,-33.167 h1.52
  text "REV:" at 34.939,-33.167 h1.52
  text ".PRJ_Number" at 56.39,-33.167 h1.52
  text "BOARD #:" at 70.245,-33.167 h1.52
  text "PCB VIEWED FROM BOTTOM SIDE" at 133.148,-33.167 h1.52
  text "IGNORE ->" at 39.215,-38.306 h1.52
  text "TEXAS INSTRUMENTS" at -2.526,-43.547 h1.52
  text ".Print_Time" at 29.593,-43.547 h1.52
  text ".Print_Date" at 48.109,-43.547 h1.52
  text "GENERATED    :" at 70.195,-43.547 h1.52
  text ".plot_File_Name" at 112.689,-43.547 h1.52
  text "PLOT NAME =" at 133.148,-43.547 h1.52
M9 Title Sheet:
  drawing of 57 lines, arcs and shapes, not listed
  text "1" at -6.708,187.627 h1.78
  text "2" at 56.682,187.627 h1.78
  text "3" at 119.911,187.627 h1.78
  text "4" at 183.58,187.627 h1.78
  text "5" at 247.055,187.627 h1.78
  text "6" at 310.682,187.627 h1.78
  text "A" at -36.079,158.595 h1.78
  text "A" at 339.841,158.595 h1.78
  text "B" at -36.079,98.143 h1.78
  text "B" at 339.841,98.143 h1.78
  text "C" at -36.079,37.818 h1.78
  text "C" at 339.841,37.818 h1.78
  text "PROJECT TITLE:" at 262.625,-9.452 h1.14
  text ".PRJ_Title" at 263.895,-12.838 h1.78
  text "DESIGNED FOR:" at 262.625,-17.097 h1.14
  text ".PRJ_Customer" at 263.895,-20.653 h1.78
  text "D" at -36.079,-22.38 h1.78
  text "D" at 339.841,-22.38 h1.78
  text "FILE NAME:" at 262.625,-24.717 h1.14
  text ".PCB_File_Name_No_Path" at 263.895,-27.765 h1.78
  text "Texas Instruments (TI) and/or its licensors do not warrant the accuracy or completeness of this specification" at 136.4,-31.876 h1.14
  text "ENGINEER:" at 262.625,-32.083 h1.14
  text "LAYOUT BY:" at 300.852,-32.083 h1.14
  text "or any information contained therein. TI and/or its licensors do not warrant that this design will meet" at 135.257,-34.737 h1.14
  text ".PRJ_Engineer" at 263.895,-36.02 h1.78
  text ".PCB_Layout" at 302.135,-36.02 h1.78
  text "the specifications, will be suitable for your application or fit for any particular purpose, or will operate in" at 135.257,-37.599 h1.14
  text ".Layer_Name" at -10.844,-38.306 h1.52
  text "ALTIUM DESIGNER VERSION:" at 300.852,-39.957 h1.14
  text "an implementation. TI and/or its licensors do not warrant that the design is production worthy. You should" at 135.257,-40.461 h1.14
  text "completely validate and test your design implementation to confirm the system functionality for your application." at 136.4,-43.322 h1.14
  text ".print_Scale" at 263.895,-43.343 h1.78
  text ".Application_BuildNumber" at 302.135,-43.343 h1.78
  text "1" at -6.708,-48.593 h1.78
  text "2" at 56.682,-48.593 h1.78
  text "3" at 119.911,-48.593 h1.78
  text "4" at 183.58,-48.593 h1.78
  text "5" at 247.055,-48.593 h1.78
  text "6" at 310.682,-48.593 h1.78
M10 Fab Notes:
  drawing of 212 lines, arcs and shapes, not listed
  text "DESIGN INFORMATION" at 288.978,156.474 h1.52
  text "(REFER ALSO ARRAY/PANEL PROFILING INFORMATION)" at 279.794,152.366 h1.52
  text "BOARD SIZE" at 262.37,152.258 h1.52
  text "85.5" at 274.664,149.249 h1.52
  text "55 mm" at 293.664,149.249 h1.52
  text "X" at 286.957,149.011 h1.52
  text "Number of Layers :" at 272.606,144.003 h1.52
  text "2" at 300.414,143.749 h1.52
  text "MIN. TRACK WIDTH:" at 272.606,140.472 h1.52
  text "20" at 300.451,140.472 h1.52
  text "MIL" at 304.381,140.472 h1.52
  text "MIN. CLEARANCE:" at 272.606,137.119 h1.52
  text "10" at 300.451,137.119 h1.52
  text "MIL" at 304.381,137.119 h1.52
  text "MIN. VIA PAD SIZE:" at 272.606,133.766 h1.52
  text "40" at 299.689,133.766 h1.52
  text "MIL" at 304.381,133.766 h1.52
  text "0.05mm (2MIL)" at 290.259,130.167 h1.52
  text "MINIMUM ANNULAR RING" at 264.244,130.058 h1.52
  text "EXTERNAL" at 308.242,130.058 h1.52
  text "PER" at 269.324,127.061 h1.52
  text "IPC-D-275 CLASS 2 LEVEL C" at 274.912,127.061 h1.52
  text "MIL, HOLES" at 312.713,124.209 h1.52
  text "+/-" at 302.744,124.191 h1.52
  text "+/-" at 324.436,124.191 h1.52
  text "REGISTRATION TOLERANCES:" at 264.244,124.064 h1.52
  text "METAL" at 294.718,124.064 h1.52
  text "5" at 309.353,124.064 h1.52
  text "3" at 330.512,124.064 h1.52
  text "MIL" at 333.464,124.064 h1.52
  text "MATERIAL:" at 262.344,118.743 h1.52
  text "FR-4 High Tg" at 287.4,115.179 h1.52
  text "FR-408" at 273.038,114.961 h1.52
  text "X" at 283.503,114.961 h1.52
  text "OTHER" at 310.833,114.961 h1.52
  text "62 MIL (1.6mm) +/-10%" at 281.168,110.828 h1.52
  text "THICKNESS:" at 264.244,110.719 h1.52
  text "X" at 277.913,110.719 h1.52
  text "OTHER" at 313.805,110.719 h1.52
  text "TOLERANCE:" at 264.244,106.706 h1.52
  text "X" at 285.562,106.706 h1.52
  text "ANSI IPC-6012 TYPE 3 CLASS 2" at 290.31,106.706 h1.52
  text "OTHER +/-" at 290.31,102.744 h1.52
  text "BOW & TWIST:" at 264.244,98.756 h1.52
  text "X" at 285.562,98.756 h1.52
  text "ANSI IPC-6012 TYPE 3 CLASS 2" at 290.31,98.756 h1.52
  text "OTHER +/-" at 290.31,94.73 h1.52
  text "COPPER THICKNESS (FINISHED):" at 262.344,91.288 h1.52
  text "1.4MIL (1oz)" at 284.696,87.409 h1.52
  text "2MIL (1.4oz)" at 304.178,87.409 h1.52
  text "2.8MIL (2oz)" at 322.644,87.409 h1.52
  text "OUTER:" at 271.412,87.301 h1.52
  text "X" at 300.75,87.25 h1.52
  text "X" at 319.25,83.5 h1.52
  text "1.4MIL (1oz)" at 284.696,83.422 h1.52
  text "2.8MIL (2oz)" at 304.178,83.422 h1.52
  text "N/A" at 322.632,83.431 h1.52
  text "INNER SIGNAL:" at 264.07,83.313 h1.52
  text "DRILLING:" at 262.344,79.782 h1.52
  text "REFERENCE:" at 264.244,76.81 h1.52
  text "X" at 280.709,76.81 h1.52
  text "AS SHOWN" at 285.458,76.81 h1.52
  text "X" at 303.594,76.81 h1.52
  text "NC_DRILL FILES" at 307.074,76.81 h1.52
  text "PTH MIN COPPER THICKNESS:" at 264.244,72.797 h1.52
  text "X" at 298.539,72.797 h1.52
  text "1MIL" at 302.019,72.797 h1.52
  text "OTHER" at 314.643,72.797 h1.52
  text "BOARD FINISH:" at 262.344,68.759 h1.52
  text "SILKSCREEN:" at 266.287,65.761 h1.52
  text "X" at 290.386,65.761 h1.52
  text "TOP" at 293.586,65.761 h1.52
  text "X" at 303.34,65.761 h1.52
  text "BOTTOM" at 306.566,65.761 h1.52
  text "SILKSCREEN COLOR:" at 266.287,61.52 h1.52
  text "X" at 290.36,61.52 h1.52
  text "WHITE" at 293.586,61.52 h1.52
  text "OTHER" at 306.566,61.52 h1.52
  text "SOLDER RESIST COLOR:" at 266.287,57.202 h1.52
  text "X" at 280.708,53.158 h1.52
  text "GREEN" at 283.934,53.158 h1.52
  text "BLUE" at 298.946,53.158 h1.52
  text "OTHER" at 312.611,53.158 h1.52
  text "IMMERSION GOLD (ENIG)" at 289.294,48.37 h1.52
  text "ENEPIG" at 323.267,48.286 h1.52
  text "SURFACE FINISH:" at 262.344,48.261 h1.52
  text "IMM. TIN/SILVER OR EQUIV" at 270.715,44.273 h1.52
  text "OTHER" at 307.074,44.273 h1.52
  text "LEAD FREE HASL" at 316.131,44.277 h1.52
  text "X" at 302,44.25 h1.52
  text "ARRAY/PANEL:" at 262.344,39.726 h1.52
  text "CUT AND TRIM PER MECH LAYER 1" at 289.294,39.618 h1.52
  text "N.C. ROUTE" at 289.294,35.764 h1.52
  text "X" at 306.54,35.764 h1.52
  text "V. SCORE" at 311.29,35.764 h1.52
  text "CERTIFICATION:" at 262.344,32.284 h1.52
  text "MATERIALS AND WORKMANSHIP FOR ALL PCBS" at 280.759,32.284 h1.52
  text "TO MEET OR EXCEED THE REQUIREMENTS OF:" at 280.759,29.795 h1.52
  text "X" at 271.273,26.328 h1.52
  text "ANSI IPC-A-600F CLASS ->" at 274.803,26.328 h1.52
  text "X" at 316.435,26.328 h1.52
  text "2" at 319.456,26.328 h1.52
  text "1" at 311.455,26.29 h1.52
  text "3" at 328.448,26.29 h1.52
  text "X" at 271.325,22.277 h1.52
  text "UL 94V-0" at 274.803,22.277 h1.52
  text "X" at 291.95,22.277 h1.52
  text "RoHS" at 295.428,22.277 h1.52
  text "OTHER" at 311.796,22.277 h1.52
  text "PER ORDER" at 321.881,22.277 h1.52
  text "ADDITIONAL REQUIREMENTS:" at 262.344,18.695 h1.52
  text "MICROSECTION:" at 264.244,15.774 h1.52
  text "YES" at 287.249,15.774 h1.52
  text "REQUIRED" at 309.131,11.808 h1.52
  text "BARE BOARD ELEC. TEST:" at 264.244,11.736 h1.52
  text "NONE" at 297.409,11.736 h1.52
  text "X" at 305.905,11.736 h1.52
  text "PER ORDER" at 324.168,11.736 h1.52
  text "MANUFACTURER'S UL:" at 264.244,7.748 h1.52
  text "RAIL" at 293.853,7.639 h1.52
  text "METAL" at 306.345,7.639 h1.52
  text "X" at 315.876,7.63 h1.52
  text "SILK" at 319.342,7.639 h1.52
  text ".Layer_Name" at -10.844,-38.306 h1.52
M11 Gerber Information:
  lines w0.254: -32.917,-40.126 134.723,-40.126 ; -32.917,-34.962 134.774,-34.962 ; -32.917,-29.797 -32.917,-45.291 68.81,-45.291 134.774,-45.291 134.774,-29.797 -32.904,-29.797 -32.904,-45.291 7.114,-45.291 ; 29.694,-45.291 29.694,-29.797 ; 61.876,-34.962 61.876,-29.797 ; 83.212,-34.962 83.212,-29.797 ; 99.011,-45.456 99.011,-40.304
  text "ALL ARTWORK VIEWED FROM TOP SIDE" at -31.304,-33.154 h1.52
  text "BOARD #:" at 31.599,-33.154 h1.52
  text ".PRJ_Number" at 45.455,-33.154 h1.52
  text "REV:" at 66.905,-33.154 h1.52
  text ".PCB_Rev" at 74.309,-33.154 h1.52
  text "SVN REV:" at 88.19,-33.154 h1.52
  text ".VersionControl_RevNumber" at 101.043,-33.154 h1.52
  text "LAYER NAME =" at -31.304,-38.306 h1.52
  text "PLOT NAME =" at -31.304,-43.534 h1.52
  text ".plot_File_Name" at -10.844,-43.534 h1.52
  text "GENERATED    :" at 31.65,-43.534 h1.52
  text ".Print_Date" at 53.735,-43.534 h1.52
  text ".Print_Time" at 72.252,-43.534 h1.52
  text "TEXAS INSTRUMENTS" at 104.37,-43.534 h1.52
M12 Stackup:
  text ".Layer_Name" at -10.844,-38.306 h1.52
M13 Component Bodies Top:
  text ".Layer_Name" at -10.844,-38.306 h1.52
M14 Component Bodies Bottom:
  text ".Layer_Name" at -10.844,-38.306 h1.52
M15 Courtyards Top:
  text ".Layer_Name" at -10.844,-38.306 h1.52
M16 Courtyards Bottom:
  text ".Layer_Name" at -10.844,-38.306 h1.52
Drill Drawing:
  text ".legend" at 104.612,1.928 h1.52
  text "Drill Table" at 105.247,-2.771 h1.52
  text ".Layer_Name" at -10.844,-38.306 h1.52

## Dimensions
81.5,55 to 81.5,0 on M2 Board Dimensions
0,55 to 81.5,55 on M2 Board Dimensions

## Text inside footprints (layer, text, board x,y; h text height)
C1: Top Overlay "+" at 14,21.5 h1.5 r270; M5 Assembly Top "+" at 18.5,23.298 h1.5 r270
C2: Top Overlay "+" at 23.3,29.7 h1.5 r270; M5 Assembly Top "+" at 26.25,30.298 h1.5 r270
C7: Top Overlay "+" at 62.1,39.05 h1.52 r180; M5 Assembly Top "+" at 62.1,39.05 h1.52 r180
C8: Top Overlay "+" at 67.4,28.6 h1.52 r90; M5 Assembly Top "+" at 64.05,27.15 h1.52 r90
D1: Bottom Overlay "~" at 28.028,15.373 h1.5; Bottom Overlay "~" at 28.028,12.96 h1.5; Bottom Overlay "+" at 25.615,13.468 h1.5; Bottom Overlay "-" at 25.615,16.008 h1.5
ZZ1: M5 Assembly Top "Install label in silkscreened box after final wash.  Text shall be 8 pt font. Text shall be per Table 1" at -7.357,80.492 h1.02